# Altium PCB PCB1.PcbDoc
Units mm, origin at the board's own origin, x right, y up, seen from the top; angles counter-clockwise.
Board outline 65.28 x 64.52 mm, 2 copper layers (Top Layer, Bottom Layer); 33 components, 124 nets, 349 pads, 50 vias.
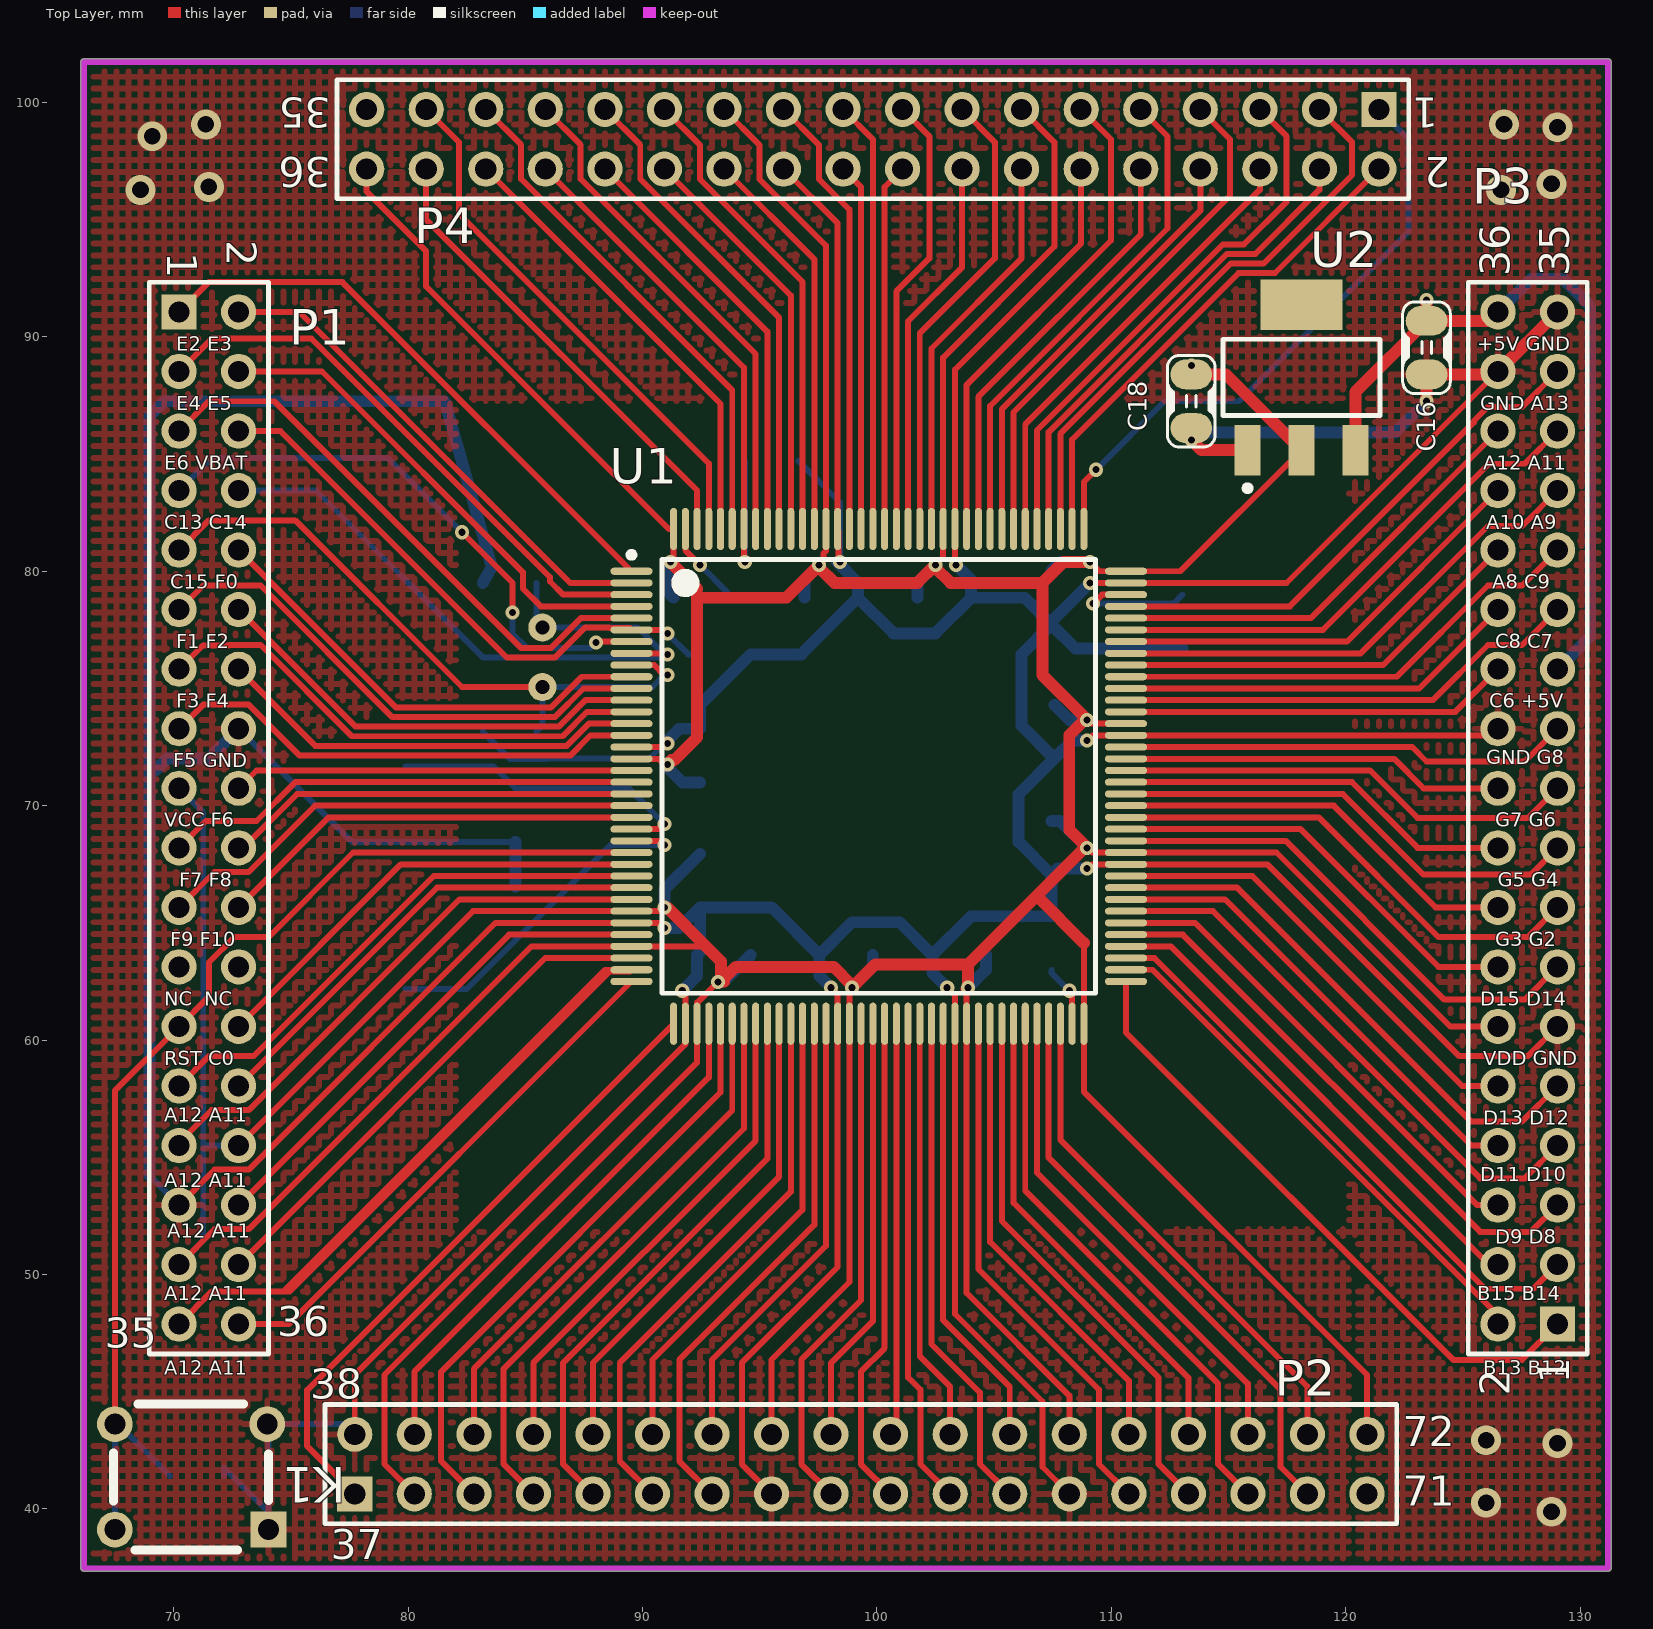
[diagram p0: Top Layer view]
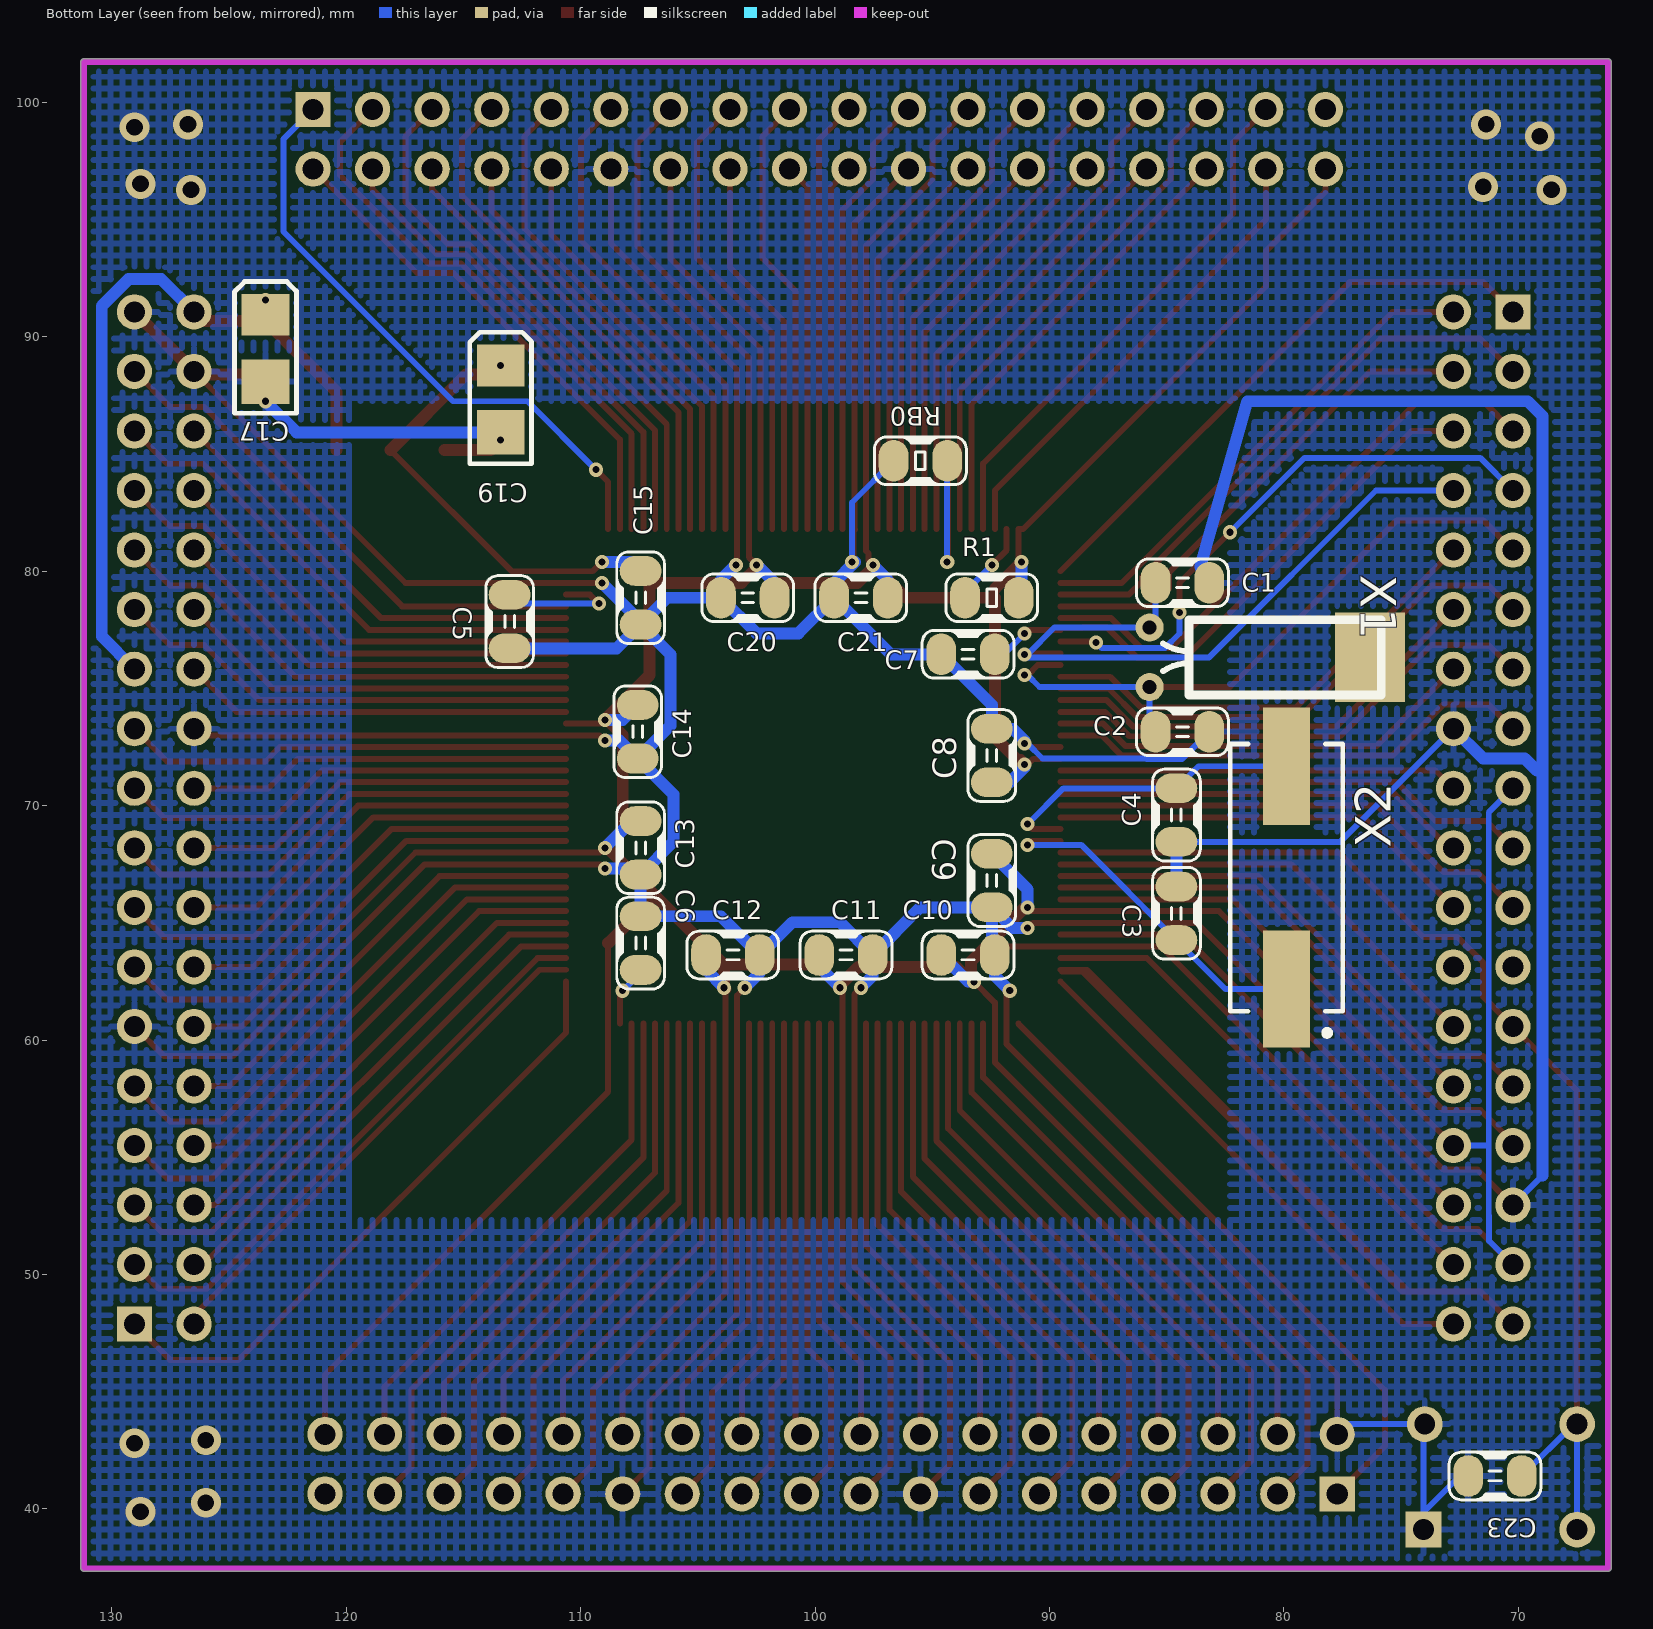
[diagram p1: Bottom Layer view, seen from below]
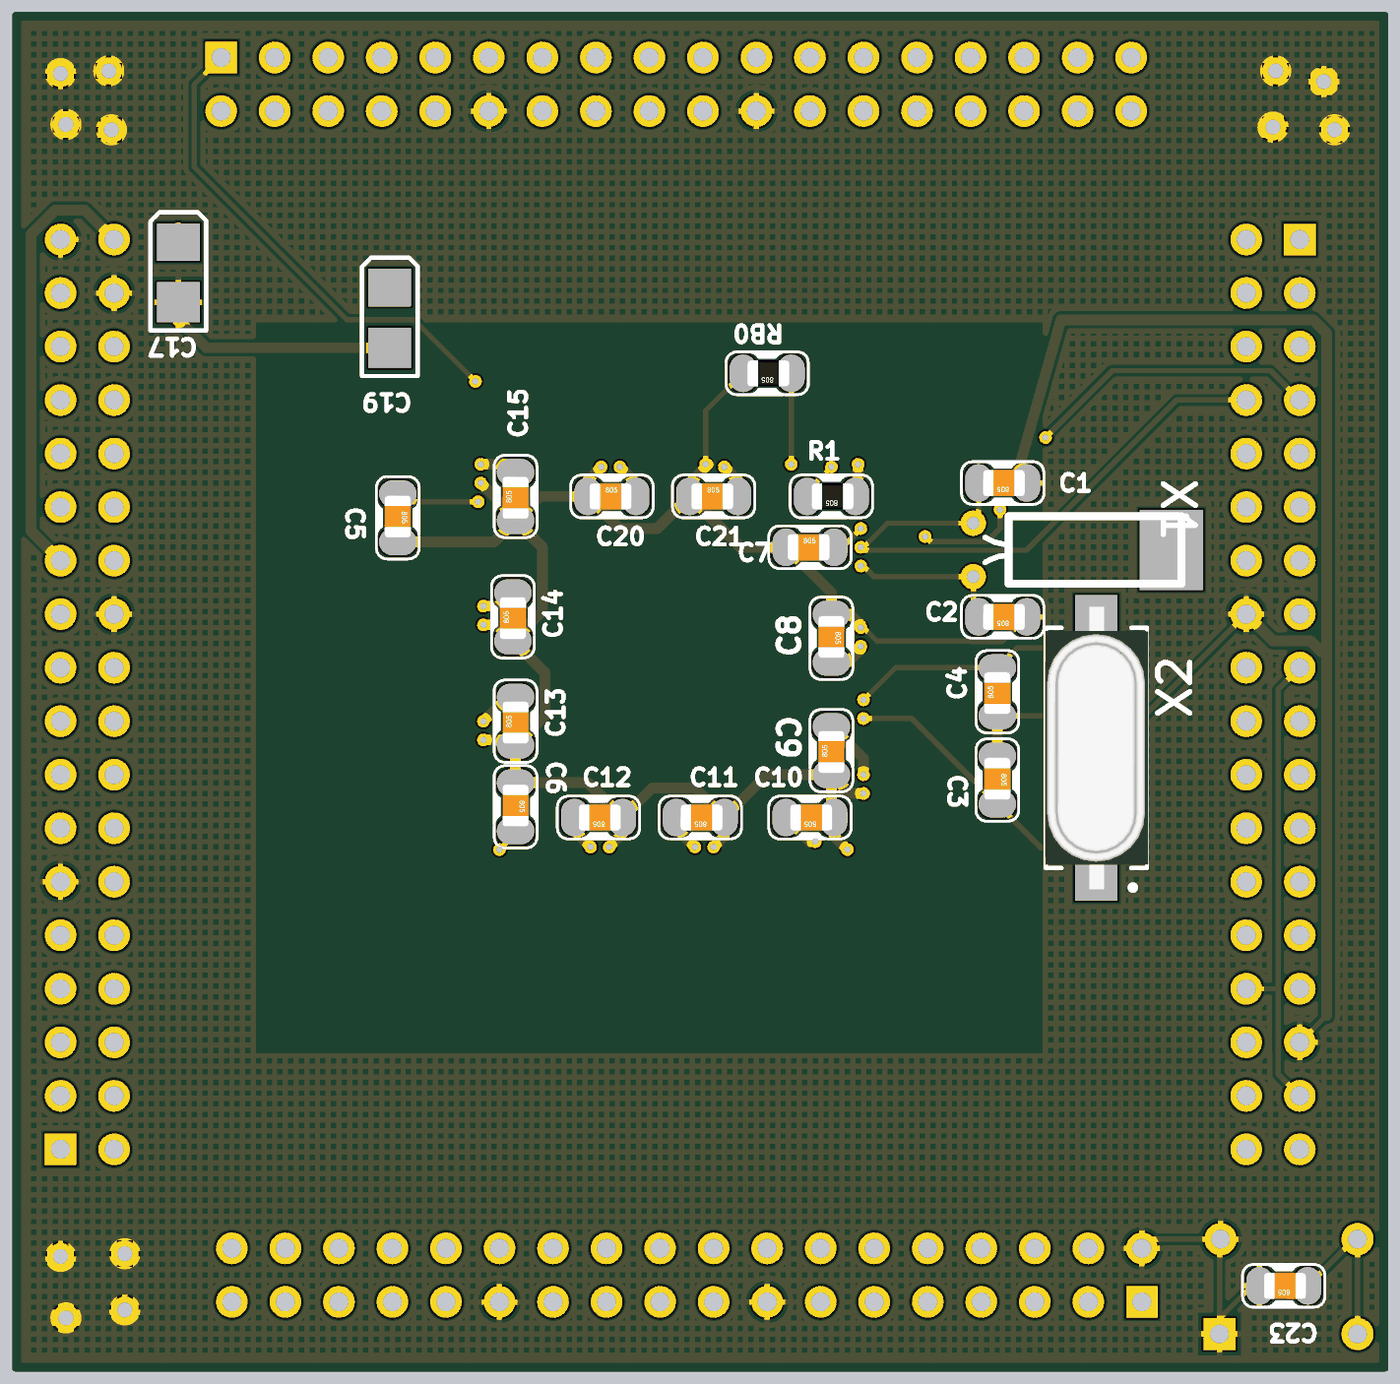
[diagram p2: 3D render of the assembled board from below, using the file's embedded part models]

## Layer stack, top to bottom
Top Solder: solder mask 0.0102, Solder Resist, Dk 3.5
Top Layer: signal copper 0.0356
Dielectric 1: dielectric 0.32, FR-4, Dk 4.8
Bottom Layer: signal copper 0.0356
Bottom Solder: solder mask 0.0102, Solder Resist, Dk 3.5

## Board outline
66.04,37.465 ccw(c66.167,37.465) 66.167,37.338 131.191,37.338 ccw(c131.191,37.465) 131.318,37.465 131.318,101.727 ccw(c131.191,101.727) 131.191,101.854 66.167,101.854 ccw(c66.167,101.727) 66.04,101.727

## Design rules (kind name [scope] priority, off if disabled: settings)
Clearance [All] p1: gap=0.152
PolygonConnect [All] p1: connectstyle=Relief reliefconductorwidth=0.254 reliefentries=4 polygonreliefangle="90 Angle" airgapwidth=0.254
RoutingVias [All] p1: holewidth=0.711 width=1.27 viastyle="Through Hole" minholewidth=0.711 minwidth=1.27 maxholewidth=0.711 maxwidth=1.27
SolderMaskExpansion [All] p1: expansion=0.102
Width VCC-GND [InNetClass('VCC-GND')] p1: maxlimit=0.762 minlimit=0.254 preferedwidth=0.254 minimp=50.000000 maximp=50.000000 favimp=50.000000
Width [All] p2: maxlimit=0.254 minlimit=0.254 preferedwidth=0.254
30 further rules are at their usual default settings.

## Classes and differential pairs
net class VCC-GND: +5V GND VCC
component class STM32F407ZGT6: C1 C2 C3 C4 C5 C6 C7 C8 C9 C10 C11 C12 C13 C14 C15 C16 C17 C18 C19 C20 C21 P1 P3 P4 R1 U1 U2 X1 X2

## Components (designator, comment, footprint, x,y, rotation, side; value= is the part's Value field where it differs from the comment)
C1 "Cap" 0805C 83.185,79.502 r0 bottom
C2 "Cap" 0805C 83.185,73.152 r0 bottom
C3 "Cap" 0805C 84.582,66.548 r270 bottom
C4 "Cap" 0805C 84.582,68.453 r90 bottom
C5 "Cap" 0805C 113.03,78.994 r270 bottom
C6 "Cap" 0805C 107.442,65.278 r270 bottom
C7 "Cap" 0805C 94.615,76.454 r180 bottom
C8 "Cap" 0805C 92.456,73.279 r270 bottom
C9 "Cap" 0805C 92.456,65.659 r90 bottom
C10 "Cap" 0805C 92.329,63.627 r0 bottom
C11 "Cap" 0805C 97.536,63.627 r0 bottom
C12 "Cap" 0805C 102.362,63.627 r0 bottom
C13 "Cap" 0805C 107.442,67.056 r90 bottom
C14 "Cap" 0805C 107.569,72.009 r90 bottom
C15 "Cap" 0805C 107.442,77.724 r90 bottom
C16 "Cap" 0805C 123.444,88.392 r90 top
C17 "Cap pol" CAP_SMD_3216 123.444,90.932 r270 bottom
C18 "Cap" 0805C 113.411,86.106 r90 top
C19 "Cap pol" CAP_SMD_3216 113.411,88.773 r270 bottom
C20 "Cap" 0805C 104.013,78.867 r180 bottom
C21 "Cap" 0805C 99.187,78.867 r180 bottom
C23 "Comment" 0805C 69.85,41.402 r0 bottom
K1 "Comment" Button 74.041,39.116 r180 top
P1 "Header 18X2" HDR2X18 70.231,91.059 r270 top
P2 "Header 18X2" HDR2X18 77.724,40.64 r0 top
P3 "Header 18X2" HDR2X18 129.032,47.879 r90 top
P4 "Header 18X2" HDR2X18 121.412,99.695 r180 top
R1 "Res" 0805R 91.313,78.867 r0 bottom
RB0 "Comment" 0805R 94.361,84.709 r0 bottom
U1 "STM32F407ZGT6" STM-LQFP144_N 100.076,71.247 r0 top
U2 "1117-xx" SOT-223_ 118.11,88.265 r0 top
X1 "XTAL_" XTAL_YUANZHU 85.725,77.597 r180 bottom
X2 "XTAL_" XTAL_SMD 79.883,66.929 r90 bottom

## Footprints (in the part's own frame and the unit in brackets; to place one, negate y for a bottom-side part, rotate by r counter-clockwise, add the part's x,y. Pads: shape width x height; smd on the part's side, far side on the other; paste and mask are expansions set on the pad)
0805C [mil] "0805封装电容"
  oval 50x70 smd: 1(0,0) 2(90,0)
  silkscreen extent -32,-40 122,40, body extent 3,-25 82,25, height 30
0805R [mil] "0805封装电阻"
  oval 50x70 smd: 1(0,0) 2(90,0)
  silkscreen extent -32,-40 122,40, body extent 3,-25 82,25, height 30
Button [mil] "按键"
  rect 60x60 hole 35: 1(0,0)
  round 60 hole 35: 2(2,-177.17) 3(257.91,-177.17) 4(257.91,0)
  silkscreen extent 0,-211 260,34, body extent -20,-210 278,34, height 276
CAP_SMD_3216 [mil] "贴片钽电容，10uF"
  rect 70x80 smd: 1(0,0)
  rect 75x80 smd: 2(112.2,0)
  silkscreen extent -56,-52 165,52, body extent -11,-35 123,35, height 63
HDR2X18 [mm] "Connector; Header; 18x2 Position"
  rect 1.5x1.5 hole 0.9: 1(0,0)
  round 1.5 hole 0.9: 2(0,2.54) 3(2.54,0) 4(2.54,2.54) 5(5.08,0) 6(5.08,2.54) 7(7.62,0) 8(7.62,2.54) 9(10.16,0) 10(10.16,2.54) 11(12.7,0) 12(12.7,2.54) 13(15.24,0) 14(15.24,2.54) 15(17.78,0) 16(17.78,2.54) 17(20.32,0) 18(20.32,2.54) 19(22.86,0) 20(22.86,2.54) 21(25.4,0) 22(25.4,2.54) 23(27.94,0) 24(27.94,2.54) 25(30.48,0) 26(30.48,2.54) 27(33.02,0) 28(33.02,2.54) 29(35.56,0) 30(35.56,2.54) 31(38.1,0) 32(38.1,2.54) 33(40.64,0) 34(40.64,2.54) 35(43.18,0) 36(43.18,2.54)
  silkscreen extent -1.27,-1.27 44.45,3.81
SOT-223_ [mm] "SOT-223/SC-73; 4 Leads; Body 6.7 x 7.3 mm, inc. leads (LxW max)"
  rect 1.1x2.15 smd: 1(-2.3,-3.1) 2(0,-3.1) 3(2.3,-3.1)
  rect 3.5x2.15 smd: 4(0,3.1)
  silkscreen extent -3.35,-4.85 3.35,1.62, body extent -3.25,-3.58 3.25,3.38, height 1.65
STM-LQFP144_N [mm] "Thin QFP, 144-Leads, Body 20x20mm, Pitch 0.5mm, IPC Medium Density"
  oval 1.8x0.3 smd: 1(-10.55,8.75) 2(-10.55,8.25) 3(-10.55,7.75) 4(-10.55,7.25) 5(-10.55,6.75) 6(-10.55,6.25) 7(-10.55,5.75) 8(-10.55,5.25) 9(-10.55,4.75) 10(-10.55,4.25) 11(-10.55,3.75) 12(-10.55,3.25) 13(-10.55,2.75) 14(-10.55,2.25) 15(-10.55,1.75) 16(-10.55,1.25) 17(-10.55,0.75) 18(-10.55,0.25) 19(-10.55,-0.25) 20(-10.55,-0.75) 21(-10.55,-1.25) 22(-10.55,-1.75) 23(-10.55,-2.25) 24(-10.55,-2.75) 25(-10.55,-3.25) 26(-10.55,-3.75) 27(-10.55,-4.25) 28(-10.55,-4.75) 29(-10.55,-5.25) 30(-10.55,-5.75) 31(-10.55,-6.25) 32(-10.55,-6.75) 33(-10.55,-7.25) 34(-10.55,-7.75) 35(-10.55,-8.25) 36(-10.55,-8.75) 73(10.55,-8.75) 74(10.55,-8.25) 75(10.55,-7.75) 76(10.55,-7.25) 77(10.55,-6.75) 78(10.55,-6.25) 79(10.55,-5.75) 80(10.55,-5.25) 81(10.55,-4.75) 82(10.55,-4.25) 83(10.55,-3.75) 84(10.55,-3.25) 85(10.55,-2.75) 86(10.55,-2.25) 87(10.55,-1.75) 88(10.55,-1.25) 89(10.55,-0.75) 90(10.55,-0.25) 91(10.55,0.25) 92(10.55,0.75) 93(10.55,1.25) 94(10.55,1.75) 95(10.55,2.25) 96(10.55,2.75) 97(10.55,3.25) 98(10.55,3.75) 99(10.55,4.25) 100(10.55,4.75) 101(10.55,5.25) 102(10.55,5.75) 103(10.55,6.25) 104(10.55,6.75) 105(10.55,7.25) 106(10.55,7.75) 107(10.55,8.25) 108(10.55,8.75)
  oval 0.3x1.8 smd: 37(-8.75,-10.55) 38(-8.25,-10.55) 39(-7.75,-10.55) 40(-7.25,-10.55) 41(-6.75,-10.55) 42(-6.25,-10.55) 43(-5.75,-10.55) 44(-5.25,-10.55) 45(-4.75,-10.55) 46(-4.25,-10.55) 47(-3.75,-10.55) 48(-3.25,-10.55) 49(-2.75,-10.55) 50(-2.25,-10.55) 51(-1.75,-10.55) 52(-1.25,-10.55) 53(-0.75,-10.55) 54(-0.25,-10.55) 55(0.25,-10.55) 56(0.75,-10.55) 57(1.25,-10.55) 58(1.75,-10.55) 59(2.25,-10.55) 60(2.75,-10.55) 61(3.25,-10.55) 62(3.75,-10.55) 63(4.25,-10.55) 64(4.75,-10.55) 65(5.25,-10.55) 66(5.75,-10.55) 67(6.25,-10.55) 68(6.75,-10.55) 69(7.25,-10.55) 70(7.75,-10.55) 71(8.25,-10.55) 72(8.75,-10.55) 109(8.75,10.55) 110(8.25,10.55) 111(7.75,10.55) 112(7.25,10.55) 113(6.75,10.55) 114(6.25,10.55) 115(5.75,10.55) 116(5.25,10.55) 117(4.75,10.55) 118(4.25,10.55) 119(3.75,10.55) 120(3.25,10.55) 121(2.75,10.55) 122(2.25,10.55) 123(1.75,10.55) 124(1.25,10.55) 125(0.75,10.55) 126(0.25,10.55) 127(-0.25,10.55) 128(-0.75,10.55) 129(-1.25,10.55) 130(-1.75,10.55) 131(-2.25,10.55) 132(-2.75,10.55) 133(-3.25,10.55) 134(-3.75,10.55) 135(-4.25,10.55) 136(-4.75,10.55) 137(-5.25,10.55) 138(-5.75,10.55) 139(-6.25,10.55) 140(-6.75,10.55) 141(-7.25,10.55) 142(-7.75,10.55) 143(-8.25,10.55) 144(-8.75,10.55)
  silkscreen extent -10.67,-9.25 9.25,9.57, body extent -10,-10 10,10, height 1.6
XTAL_SMD [mm] "假贴片晶振"
  rect 5x2 smd: 1(-4.75,0) 2(4.75,0)
  silkscreen extent -6.75,-2.4 5.7,2.4, body extent -6.7,-2.46 6.7,2.44, height 4
XTAL_YUANZHU [mm] "圆柱晶振"
  round 1.2 hole 0.6: 1(0,0) 2(0,-2.54)
  rect 3x3.8 smd: 3(9.398,-1.27)
  silkscreen extent 0.57,-2.87 9.88,0.33

## Part data
C1 C2 C3 C4 C5 C6 C7 C8 C9 C10 C11 C12 C13 C14 C15 C16 C18 C20 C21: "无极性电容"
C17 C19: "极性电容"
P1 P2 P3 P4: "Header, 18-Pin, Dual row"
R1: library part Res_, "电阻"
U1: "ARM Cortex-M4 32-bit MCU+FPU, 210 DMIPS, 1024 kB Flash, 192 kB Internal RAM, 114 I/Os, 144-pin LQFP, -40 to 85 degC, Tray"
U2: "稳压芯片"
X1 X2: library part XTAL_M, "晶振"

## Via types
v1: diameter 0.6, hole 0.3, Top Layer to Bottom Layer, 38 vias
v2: diameter 1.27, hole 0.711, Top Layer to Bottom Layer, 12 vias

## Nets (pads, with @x,y where several pads share a name; then routed paths per layer and width w, separated by ;. In a path a pad name is that pad's centre, name@x,y a point inside that pad or via, vN(x,y) a via of type N, cw(c..) or ccw(c..) an arc to the next point about the centre after c; other vN are vias at no path point)
+5V: C16.2 C17.1 P3.23 P3.36 U2.3 | length 32.1
  Top Layer w0.508: U2.3 120.41,87.644 C16.2 ; v1(123.444,91.567) C16.2 ; P3.36 126.111,90.678 C16.2
  Bottom Layer w0.254: P3.36 P3.36@126.619,91.059
  Bottom Layer w0.508: P3.36 127.889,92.456 129.286,92.456 130.429,91.313 130.429,77.216 P3.23
BOOT0: P4.30 RB0.1 U1.138 | length 24.6
  Top Layer w0.254: P4.30 94.326,88.681 U1.138 94.326,80.426 v1(94.361,80.391)
  Bottom Layer w0.254: v1(94.361,80.391) RB0.1
GND: C1.1 C2.1 C3.1 C4.1 C5.2 C6.1 C7.1 C8.1 C9.1 C10.1 C11.1 C12.1 C13.1 C14.1 C15.1 C16.1 C17.2 C18.1 C19.2 C20.1 C21.1 C23.2 K1.1 K1.2 P1.16 P1.31 P2.2 P2.15 P2.25 P3.11 P3.22 P3.34 P3.35 P4.12 P4.22 RB0.2 U1.16 U1.31 U1.38 U1.51 U1.61 U1.83 U1.94 U1.107 U1.120 U1.130 U2.1 | length 399.3
  Top Layer w0.254: P1.31 71.742,54.47 73.197,54.47 83.725,64.997 U1.31 90.705,64.997 v1(90.932,64.77) ; P2.2 77.724,45.72 91.826,59.822 U1.38 91.826,61.971 v1(91.694,62.103) ; U1.16 90.912,72.497 v1(91.059,72.644) ; P2.15 94.234,41.91 94.234,46.228 98.326,50.32 U1.51 98.326,61.948 v1(98.044,62.23) ; P4.22 98.326,94.841 U1.130 98.298,81.769 98.361,81.706 98.361,80.391 v1@98.298,80.391 ; v1(102.997,62.23) 103.326,61.901 U1.61 103.326,48.312 107.061,44.577 107.061,41.783 P2.25 ; v1(103.378,80.264) 103.326,80.316 U1.120 103.326,88.594 108.712,93.98 P4.12 ; v1(108.966,67.31) 109.153,67.497 U1.83 116.653,67.497 124.841,59.309 127.762,59.309 P3.11 ; v1(108.966,72.771) 109.192,72.997 U1.94 126.21,72.997 P3.22 ; v1(109.093,79.502) 109.098,79.497 U1.107 117.47,79.497 P3.34@126.365,88.392
  Top Layer w0.508: C18.1 v1(113.411,85.598) 113.844,85.165 U2.1 ; v1(123.444,87.249) C16.1 126.365,88.392 P3.34 P3.35
  Bottom Layer w0.254: 68.961,54.229 P1.31 ; 68.961,71.247 69.202,71.488 ; C23.2 72.136,41.762 74.041,39.857 74.041,43.565 K1.2 77.288,43.616 P2.2 ; P1.16 77.597,68.453 C4.1 ; C2.1 84.353,71.984 85.85,71.984 85.875,72.009 90.297,72.009 90.932,72.644 v1(91.059,72.644) ; RB0.2 98.425,82.931 v1(98.425,80.391)
  Bottom Layer w0.508: 68.961,54.229 68.961,71.247 68.961,86.614 69.596,87.249 81.562,87.249 83.564,80.181 C1.1 ; 69.202,71.488 69.723,72.009 71.501,72.009 P1.16 ; C3.1 C4.1 ; v1(90.932,64.77) 91.567,64.77 C9.1 ; v1(91.059,72.644) 91.059,72.771 91.567,73.279 C8.1 92.456,74.295 C7.1 96.774,76.454 C21.1 ; v1(91.694,62.103) 92.329,62.738 C10.1 92.456,63.754 C9.1 ; v1(98.044,62.23) 97.536,62.738 C11.1 ; v1@98.298,80.391 99.187,79.502 C21.1 ; v1(102.997,62.23) 102.362,62.865 C12.1 ; v1(103.378,80.264) 104.013,79.629 C20.1 ; v1(108.966,67.31) 107.696,67.31 C13.1 ; v1(108.966,72.771) 108.331,72.771 C14.1 ; v1(109.093,79.502) 107.442,77.851 C15.1 ; C5.2 108.458,76.708 C15.1 ; C19.2 122.118,85.923 v1(123.444,87.249) ; C9.1 95.504,65.659 C11.1 ; C11.1 98.933,65.024 100.965,65.024 C12.1 ; C21.1 100.711,77.343 102.489,77.343 C20.1 ; C12.1 104.013,65.278 C6.1 C13.1 ; C20.1 106.299,78.867 C15.1 ; C13.1 106.045,68.453 106.045,70.485 C14.1 ; C15.1 106.172,76.454 106.172,73.406 C14.1
  other v2: 128.778,39.878 125.984,40.259 129.032,42.799 125.984,42.926 68.58,96.266 126.619,96.266 71.501,96.393 128.778,96.52 69.088,98.552 129.032,98.933 71.374,99.06 126.746,99.06
NetC3_2: C3.2 U1.24 X2.1 | length 15.1
  Top Layer w0.254: U1.24 90.761,68.497 v1(90.932,68.326)
  Bottom Layer w0.254: X2.1 82.499,62.179 C3.2 88.646,68.326 v1(90.932,68.326)
NetC4_2: C4.2 U1.23 X2.2 | length 13.6
  Top Layer w0.254: U1.23 90.714,68.997 v1(90.932,69.215)
  Bottom Layer w0.254: X2.2 83.642,71.679 C4.2 89.408,70.739 v1(90.932,69.215)
NetC5_1: C5.1 U1.106 | length 5.5
  Top Layer w0.254: v1(109.22,78.613) 109.604,78.997 U1.106
  Bottom Layer w0.254: v1(109.22,78.613) 112.649,78.613 C5.1
NetC6_2: C6.2 U1.71 | length 2.7
  Top Layer w0.254: v1(108.204,62.103) 108.326,61.981 U1.71
  Bottom Layer w0.254: C6.2 107.442,62.865 v1(108.204,62.103)
NetR1_2: R1.2 U1.143 | length 3.7
  Top Layer w0.254: U1.143 91.826,80.894 v1(92.456,80.264)
  Bottom Layer w0.254: v1(92.456,80.264) 93.599,79.121 R1.2
PA0: P1.34 U1.34 | length 22.2
  Top Layer w0.254: P1.34 85.849,63.497 U1.34
PA1: P1.35 U1.35 | length 46.1
  Top Layer w0.254: P1.35 71.628,49.276 74.686,49.276 ; 74.686,49.276 88.407,62.997 U1.35 89.455,62.926 88.598,62.926 74.948,49.276 74.686,49.276
PA2: P1.36 U1.36 | length 22.8
  Top Layer w0.254: P1.36 74.908,47.879 U1.36
PA3: P2.1 U1.37 | length 27.4
  Top Layer w0.254: P2.1 75.692,42.672 75.692,45.063 U1.37
PA4: P2.4 U1.40 | length 22.7
  Top Layer w0.254: P2.4 80.264,45.847 92.826,58.409 U1.40
PA5: P2.5 U1.41 | length 25.6
  Top Layer w0.254: P2.5 81.407,42.037 81.407,45.847 93.326,57.766 U1.41
PA6: P2.6 U1.42 | length 22.1
  Top Layer w0.254: P2.6 82.804,45.974 93.826,56.996 U1.42
PA7: P2.7 U1.43 | length 24.8
  Top Layer w0.254: P2.7 84.074,41.91 84.074,45.974 94.326,56.226 U1.43
PA8: P3.28 U1.100 | length 17.9
  Top Layer w0.254: U1.100 121.59,75.997 P3.28
PA9: P3.29 U1.101 | length 21.3
  Top Layer w0.254: U1.101 120.634,76.497 126.066,81.928 127.521,81.928 P3.29
PA10: P3.30 U1.102 | length 18.5
  Top Layer w0.254: U1.102 120.05,76.997 P3.30
PA11: P3.31 U1.103 | length 21.9
  Top Layer w0.254: U1.103 119.026,77.497 126.111,84.582 127.635,84.582 P3.31
PA12: P3.32 U1.104 | length 19.2
  Top Layer w0.254: U1.104 118.51,77.997 P3.32
PA13: P3.33 U1.105 | length 22.6
  Top Layer w0.254: U1.105 117.613,78.497 125.463,86.347 125.463,86.405 126.066,87.008 127.521,87.008 P3.33
PA14: P4.1 U1.109 | length 26
  Top Layer w0.254: U1.109 108.826,83.807 v1(109.347,84.328)
  Bottom Layer w0.254: v1(109.347,84.328) 112.268,87.249 115.443,87.249 122.682,94.488 122.682,98.425 P4.1
PA15: P4.2 U1.110 | length 21.7
  Top Layer w0.254: U1.110 108.326,85.616 115.429,92.719 116.976,92.719 P4.2
PB0: P2.10 U1.46 | length 20.8
  Top Layer w0.254: P2.10 87.884,46.228 95.826,54.17 U1.46
PB1: P2.11 U1.47 | length 23.7
  Top Layer w0.254: P2.11 89.027,42.037 89.027,46.228 96.326,53.527 U1.47
PB2: P2.12 U1.48 | length 20.2
  Top Layer w0.254: P2.12 90.424,46.355 96.826,52.757 U1.48
PB3: P4.25 U1.133 | length 20.3
  Top Layer w0.254: P4.25 92.443,98.184 92.443,96.729 96.826,92.345 U1.133
PB4: P4.26 U1.134 | length 17.6
  Top Layer w0.254: P4.26 96.326,91.761 U1.134
PB5: P4.27 U1.135 | length 21
  Top Layer w0.254: P4.27 89.903,98.184 89.903,96.729 95.826,90.805 U1.135
PB6: P4.28 U1.136 | length 18.2
  Top Layer w0.254: P4.28 95.326,90.221 U1.136
PB7: P4.29 U1.137 | length 21.6
  Top Layer w0.254: P4.29 87.363,98.184 87.363,96.729 94.826,89.265 U1.137
PB8: P4.31 U1.139 | length 22.3
  Top Layer w0.254: P4.31 84.823,98.184 84.823,96.729 93.826,87.725 U1.139
PB9: P4.32 U1.140 | length 19.5
  Top Layer w0.254: P4.32 93.326,87.141 U1.140
PB10: P2.33 U1.69 | length 24.6
  Top Layer w0.254: U1.69 107.326,54.98 117.221,45.085 117.221,41.783 P2.33
PB11: P2.34 U1.70 | length 21.9
  Top Layer w0.254: U1.70 107.826,55.75 118.364,45.212 P2.34
PB12: P3.1 U1.73 | length 27
  Top Layer w0.254: U1.73 110.626,60.316 124.587,46.355 127.508,46.355 P3.1
PB13: P3.2 U1.74 | length 22.4
  Top Layer w0.254: U1.74 111.755,62.997 126.492,48.26 P3.2
PB14: P3.3 U1.75 | length 24.7
  Top Layer w0.254: U1.75 111.83,63.497 125.937,49.39 128.003,49.39 P3.3
PB15: P3.4 U1.76 | length 21.5
  Top Layer w0.254: U1.76 112.533,63.997 126.111,50.419 P3.4
PC0: P1.26 U1.26 | length 19.6
  Top Layer w0.254: P1.26 79.689,67.497 U1.26
PC1: P1.27 U1.27 | length 23
  Top Layer w0.254: P1.27 71.501,59.309 73.406,59.309 81.094,66.997 U1.27
PC2: P1.28 U1.28 | length 20.3
  Top Layer w0.254: P1.28 81.229,66.497 U1.28
PC3: P1.29 U1.29 | length 23.7
  Top Layer w0.254: P1.29 70.231,55.626 71.615,57.01 73.197,57.01 82.185,65.997 U1.29
PC4: P2.8 U1.44 | length 21.4
  Top Layer w0.254: P2.8 85.344,46.228 94.826,55.71 U1.44
PC5: P2.9 U1.45 | length 24.2
  Top Layer w0.254: P2.9 86.614,41.91 86.614,46.228 95.326,54.94 U1.45
PC6: P3.24 U1.96 | length 16.6
  Top Layer w0.254: U1.96 124.67,73.997 P3.24
PC7: P3.25 U1.97 | length 20
  Top Layer w0.254: U1.97 123.714,74.497 126.066,76.848 127.521,76.848 P3.25
PC8: P3.26 U1.98 | length 17.3
  Top Layer w0.254: U1.98 123.13,74.997 P3.26
PC9: P3.27 U1.99 | length 20.6
  Top Layer w0.254: U1.99 122.174,75.497 126.066,79.388 127.521,79.388 P3.27
PC10: P4.3 U1.111 | length 24.4
  Top Layer w0.254: U1.111 107.826,85.855 115.097,93.126 116.494,93.126 120.269,96.901 120.269,98.298 P4.3
PC11: P4.4 U1.112 | length 20.8
  Top Layer w0.254: U1.112 107.326,85.93 114.928,93.532 116.138,93.532 118.872,96.266 P4.4
PC12: P4.5 U1.113 | length 23.3
  Top Layer w0.254: U1.113 106.826,86.004 114.76,93.939 115.656,93.939 117.475,95.758 117.475,98.552 P4.5
PC13: P1.7 U1.7 | length 24.6
  Top Layer w0.254: v1(82.296,81.661) 84.455,79.502 v1(84.455,78.232) ; v1(88.011,76.962) 88.046,76.997 U1.7
  Bottom Layer w0.254: P1.7 71.628,84.836 79.121,84.836 v1(82.296,81.661) ; v1(84.455,78.232) 84.455,77.343 85.08,76.718 87.767,76.718 v1(88.011,76.962)
PC14: C1.2 P1.8 U1.8 X1.1 | length 31.3
  Top Layer w0.254: U1.8 90.889,76.497 91.059,76.327 v1(91.059,76.454)
  Bottom Layer w0.254: P1.8 76.073,83.439 83.201,76.311 91.043,76.311 v1@91.059,76.327 ; C1.2 85.471,77.851 X1.1 89.789,77.597 90.932,76.454 v1(91.059,76.454) ; v1@90.889,76.497 v1@91.059,76.327 ; v1@91.059,76.327 v1(91.059,76.454) ; v1@91.059,76.327 v1(91.059,76.454)
PC15: C2.2 P1.9 U1.9 X1.2 | length 28.2
  Top Layer w0.254: P1.9 71.501,82.169 75.184,82.169 82.296,75.057 X1.2 ; U1.9 90.5,75.997 90.932,75.565 v1(91.059,75.565)
  Bottom Layer w0.254: C2.2 85.725,73.406 X1.2 90.424,75.057 90.932,75.565 v1(91.059,75.565)
PD0: P4.6 U1.114 | length 19.5
  Top Layer w0.254: U1.114 106.326,86.26 116.332,96.266 P4.6
PD1: P4.7 U1.115 | length 22.2
  Top Layer w0.254: U1.115 105.826,86.776 115.062,96.012 115.062,98.425 P4.7
PD2: P4.8 U1.116 | length 18.9
  Top Layer w0.254: U1.116 105.326,86.911 113.792,95.377 P4.8
PD3: P4.9 U1.117 | length 21.5
  Top Layer w0.254: U1.117 104.826,87.046 112.395,94.615 112.395,98.552 P4.9
PD4: P4.10 U1.118 | length 18.2
  Top Layer w0.254: U1.118 104.326,87.435 111.252,94.361 P4.10
PD5: P4.11 U1.119 | length 21
  Top Layer w0.254: U1.119 103.826,87.951 109.982,94.107 109.982,98.425 P4.11
PD6: P4.14 U1.122 | length 17
  Top Layer w0.254: U1.122 102.326,89.499 106.172,93.345 P4.14
PD7: P4.15 U1.123 | length 19.8
  Top Layer w0.254: U1.123 101.826,90.142 105.029,93.345 105.029,98.298 P4.15
PD8: P3.5 U1.77 | length 24.1
  Top Layer w0.254: U1.77 113.049,64.497 125.73,51.816 127.889,51.816 P3.5
PD9: P3.6 U1.78 | length 20.9
  Top Layer w0.254: U1.78 113.565,64.997 125.603,52.959 P3.6
PD10: P3.7 U1.79 | length 23.7
  Top Layer w0.254: U1.79 114.335,65.497 125.73,54.102 127.635,54.102 P3.7
PD11: P3.8 U1.80 | length 20.2
  Top Layer w0.254: U1.80 114.851,65.997 125.349,55.499 P3.8
PD12: P3.9 U1.81 | length 23.2
  Top Layer w0.254: U1.81 115.367,66.497 125.336,56.528 126.918,56.528 126.932,56.515 127.508,56.515 P3.9
PD13: P3.10 U1.82 | length 19.6
  Top Layer w0.254: U1.82 116.01,66.997 124.968,58.039 P3.10
PD14: P3.13 U1.85 | length 21.8
  Top Layer w0.254: U1.85 117.431,68.497 124.206,61.722 127.635,61.722 P3.13
PD15: P3.14 U1.86 | length 18.3
  Top Layer w0.254: U1.86 118.074,68.997 123.952,63.119 P3.14
PE0: P4.33 U1.141 | length 22.9
  Top Layer w0.254: P4.33 82.169,98.298 82.169,95.248 92.826,84.591 U1.141
PE1: P4.34 U1.142 | length 20.1
  Top Layer w0.254: P4.34 80.772,94.996 92.326,83.442 U1.142
PE2: P1.1 U1.1 | length 24.9
  Top Layer w0.254: P1.1 71.501,92.329 77.194,92.329 U1.1
PE3: P1.2 U1.2 | length 21.5
  Top Layer w0.254: P1.2 75.358,91.059 86.92,79.497 U1.2
PE4: P1.3 U1.3 | length 24.5
  Top Layer w0.254: P1.3 71.628,89.916 75.876,89.916 86.05,79.742 86.05,79.558 86.611,78.997 U1.3
PE5: P1.4 U1.4 | length 21.3
  Top Layer w0.254: P1.4 76.327,88.519 84.892,79.954 84.892,79.262 85.657,78.497 U1.4
PE6: P1.5 U1.5 | length 24.7
  Top Layer w0.254: P1.5 71.501,87.249 74.295,87.249 84.826,76.718 86.089,76.718 87.369,77.997 U1.5
PE7: P2.22 U1.58 | length 18.1
  Top Layer w0.254: U1.58 101.826,46.51 103.124,45.212 P2.22
PE8: P2.23 U1.59 | length 21.4
  Top Layer w0.254: U1.59 102.326,47.026 104.394,44.958 104.394,41.91 P2.23
PE9: P2.24 U1.60 | length 18.7
  Top Layer w0.254: U1.60 102.826,48.05 105.664,45.212 P2.24
PE10: P2.27 U1.63 | length 22.7
  Top Layer w0.254: U1.63 104.326,50.233 109.474,45.085 109.474,41.91 P2.27
PE11: P2.28 U1.64 | length 20
  Top Layer w0.254: U1.64 104.826,51.384 110.744,45.466 P2.28
PE12: P2.29 U1.65 | length 23.4
  Top Layer w0.254: U1.65 105.326,52.281 112.014,45.593 112.014,41.91 P2.29
PE13: P2.30 U1.66 | length 20.6
  Top Layer w0.254: U1.66 105.826,53.051 113.284,45.593 P2.30
PE14: P2.31 U1.67 | length 24
  Top Layer w0.254: U1.67 106.326,53.567 114.554,45.339 114.554,41.91 P2.31
PE15: P2.32 U1.68 | length 21.2
  Top Layer w0.254: U1.68 106.826,54.337 115.824,45.339 P2.32
PF0: P1.10 U1.10 | length 20.1
  Top Layer w0.254: P1.10 79.492,74.178 86.089,74.178 87.409,75.497 U1.10
PF1: P1.11 U1.11 | length 22.6
  Top Layer w0.254: P1.11 71.26,79.388 73.707,79.388 79.324,73.771 86.258,73.771 87.483,74.997 U1.11
PF2: P1.12 U1.12 | length 19.3
  Top Layer w0.254: P1.12 77.765,73.365 86.426,73.365 87.558,74.497 U1.12
PF3: P1.13 U1.13 | length 21.8
  Top Layer w0.254: P1.13 71.247,76.835 72.331,76.835 72.345,76.848 73.707,76.848 77.597,72.958 86.594,72.958 87.633,73.997 U1.13
PF4: P1.14 U1.14 | length 18.5
  Top Layer w0.254: P1.14 76.038,72.552 86.763,72.552 87.708,73.497 U1.14
PF5: P1.15 U1.15 | length 21
  Top Layer w0.254: P1.15 71.26,74.308 73.197,74.308 75.36,72.146 86.931,72.146 87.782,72.997 U1.15
PF6: P1.18 U1.18 | length 17.1
  Top Layer w0.254: P1.18 73.529,71.497 U1.18
PF7: P1.19 U1.19 | length 20.5
  Top Layer w0.254: P1.19 71.374,69.342 73.533,69.342 75.188,70.997 U1.19
PF8: P1.20 U1.20 | length 17.7
  Top Layer w0.254: P1.20 72.965,68.199 75.263,70.497 U1.20
PF9: P1.21 U1.21 | length 21.1
  Top Layer w0.254: P1.21 71.742,67.17 73.197,67.17 76.025,69.997 U1.21
PF10: P1.22 U1.22 | length 18.3
  Top Layer w0.254: P1.22 76.609,69.497 U1.22
PF11: P2.13 U1.49 | length 23
  Top Layer w0.254: P2.13 91.567,42.037 91.567,46.355 97.326,52.114 U1.49
PF12: P2.14 U1.50 | length 19.5
  Top Layer w0.254: P2.14 92.964,46.355 97.826,51.217 U1.50
PF13: P2.17 U1.53 | length 21.6
  Top Layer w0.254: P2.17 96.774,41.91 96.774,46.355 99.326,48.907 U1.53
PF14: P2.18 U1.54 | length 18.3
  Top Layer w0.254: P2.18 98.044,46.228 99.826,48.01 U1.54
PF15: P2.19 U1.55 | length 21
  Top Layer w0.254: U1.55 100.326,46.859 99.314,45.847 99.314,41.91 P2.19
PG0: P2.20 U1.56 | length 17.6
  Top Layer w0.254: P2.20 100.826,43.422 U1.56
PG1: P2.21 U1.57 | length 20.8
  Top Layer w0.254: U1.57 101.326,45.613 101.854,45.085 101.854,41.91 P2.21
PG2: P3.15 U1.87 | length 21
  Top Layer w0.254: U1.87 118.844,69.497 123.952,64.389 127.762,64.389 P3.15
PG3: P3.16 U1.88 | length 17.7
  Top Layer w0.254: U1.88 119.487,69.997 123.825,65.659 P3.16
PG4: P3.17 U1.89 | length 20.3
  Top Layer w0.254: U1.89 119.876,70.497 123.317,67.056 127.889,67.056 P3.17
PG5: P3.18 U1.90 | length 17
  Top Layer w0.254: U1.90 120.265,70.997 123.063,68.199 P3.18
PG6: P3.19 U1.91 | length 19.8
  Top Layer w0.254: U1.91 121.035,71.497 123.063,69.469 127.762,69.469 P3.19
PG7: P3.20 U1.92 | length 16.4
  Top Layer w0.254: U1.92 122.059,71.997 123.317,70.739 P3.20
PG8: P3.21 U1.93 | length 19.2
  Top Layer w0.254: U1.93 122.829,72.497 123.444,71.882 127.635,71.882 P3.21
PG9: P4.16 U1.124 | length 16.3
  Top Layer w0.254: U1.124 101.326,90.658 103.632,92.964 P4.16
PG10: P4.17 U1.125 | length 19
  Top Layer w0.254: U1.125 100.826,91.936 102.235,93.345 102.235,98.552 P4.17
PG11: P4.18 U1.126 | length 15.7
  Top Layer w0.254: U1.126 100.326,96.389 P4.18
PG12: P4.19 U1.127 | length 18.4
  Top Layer w0.254: P4.19 99.826,98.421 U1.127
PG13: P4.20 U1.128 | length 15.7
  Top Layer w0.254: P4.20 99.326,96.381 U1.128
PG14: P4.21 U1.129 | length 19.1
  Top Layer w0.254: P4.21 97.523,98.184 97.523,96.729 98.826,95.425 U1.129
PG15: P4.24 U1.132 | length 17
  Top Layer w0.254: P4.24 97.326,93.301 U1.132
RST: C23.1 K1.3 K1.4 P1.25 U1.25 | length 48.9
  Top Layer w0.254: K1.3 67.49,57.838 P1.25 71.501,61.849 71.501,63.305 72.585,64.389 74.041,64.389 77.649,67.997 U1.25
  Bottom Layer w0.254: K1.4 K1.3 ; K1.3@67.636,43.616 C23.1
VBAT: C7.2 P1.6 U1.6 | length 24.6
  Top Layer w0.254: P1.6 74.549,85.979 84.217,76.311 86.258,76.311 87.537,77.591 88.575,77.591 88.598,77.568 89.455,77.568 U1.6 90.905,77.497 v1(91.059,77.343)
  Bottom Layer w0.254: v1(91.059,77.343) 91.948,76.454 C7.2
VCC: C8.2 C9.2 C10.2 C11.2 C12.2 C13.2 C14.2 C15.2 C18.2 C19.1 C20.2 C21.2 P1.17 P1.30 P1.33 P2.3 P2.16 P2.26 P2.36 P3.12 P4.13 P4.23 P4.36 R1.1 U1.17 U1.30 U1.33 U1.39 U1.52 U1.62 U1.72 U1.84 U1.95 U1.108 U1.121 U1.131 U1.144 U2.2 | length 364.6
  Top Layer w0.254: P1.33 71.742,51.93 73.197,51.93 85.265,63.997 U1.33 92.704,63.997 ; P1.30 82.769,65.497 U1.30 90.77,65.497 v1(90.932,65.659) ; P4.36 78.232,96.19 80.772,93.65 80.772,92.145 91.12,81.797 U1.144 91.326,80.531 v1(91.186,80.391) ; P2.3 78.994,41.91 78.994,45.72 92.326,59.052 U1.39 92.326,61.592 v1(93.218,62.484) ; U1.17 90.69,71.997 90.932,71.755 v1(91.059,71.755) v1@91.042,71.755 ; P4.23 94.983,98.184 94.983,96.729 97.826,93.885 U1.131 97.826,80.865 97.719,80.758 97.719,80.447 v1(97.536,80.264) ; P2.16 95.504,46.355 98.826,49.677 U1.52 98.826,62.123 v1(98.933,62.23) ; v1(102.489,80.264) 102.826,80.601 U1.121 102.826,89.11 107.569,93.853 107.569,98.298 P4.13 ; v1@103.826,62.17 U1.62 103.826,49.209 108.204,44.831 P2.26 ; 108.826,64.131 U1.72 108.826,57.798 120.904,45.72 P2.36 ; v1(108.966,68.199) 109.168,67.997 U1.84 117.042,67.997 124.46,60.579 P3.12 ; v1(108.966,73.66) 109.129,73.497 U1.95 ; v1(109.093,80.391) 109.487,79.997 U1.108 112.942,79.997 U2.2 ; C18.2 v1(113.411,88.773)
  Top Layer w0.508: v1(90.932,65.659) 91.042,65.659 92.704,63.997 93.345,63.356 v1@93.345,62.484 ; v1@91.042,71.755 91.225,71.938 91.352,71.938 92.329,72.915 92.329,78.867 96.139,78.867 v1(97.536,80.264) 97.536,80.154 98.188,79.502 101.727,79.502 v1(102.489,80.264) 102.489,80.154 103.141,79.502 107.061,79.502 ; v1(91.186,80.391) 92.329,79.248 ; v1(93.218,62.484) v1@93.345,62.484 ; v1@93.472,62.484 v1@93.345,62.484 ; v1@103.826,62.17 v1(103.886,62.23) 103.886,63.229 ; 108.826,64.131 106.807,66.15 ; v1(109.093,80.391) 107.95,80.391 107.061,79.502 ; C18.2 114.883,88.392 U2.2 ; v1@93.345,62.484 93.98,63.119 98.154,63.119 98.933,62.34 v1(98.933,62.23) 99.932,63.229 103.886,63.229 ; 103.886,63.229 106.807,66.15 ; 106.807,66.15 108.856,68.199 v1(108.966,68.199) 108.204,68.961 108.204,73.008 108.856,73.66 v1(108.966,73.66) 107.061,75.565 107.061,79.502
  Bottom Layer w0.254: P1.33 71.247,51.435 71.247,52.506 71.26,52.519 71.26,55.499 ; P1.17 71.26,69.71 71.26,55.499 ; P1.30 71.26,55.499
  Bottom Layer w0.508: v1(90.932,65.659) 90.932,66.421 C9.2 ; v1@91.042,71.755 v1(91.059,71.755) 91.059,71.628 91.694,70.993 C8.2 ; v1(91.186,80.391) 91.186,78.994 R1.1 ; v1@93.472,62.484 C10.2 ; C21.2 96.901,79.629 v1(97.536,80.264) ; v1(98.933,62.23) 99.822,63.119 C11.2 ; C20.2 101.727,79.502 v1(102.489,80.264) ; v1(103.886,62.23) 104.648,62.992 C12.2 ; C13.2 107.823,69.342 v1(108.966,68.199) ; C15.2 107.823,80.391 v1(109.093,80.391) ; C14.2 108.204,73.66 v1(108.966,73.66)
VREF+: P1.32 U1.32 | length 21.5
  Top Layer w0.254: P1.32 84.309,64.497 U1.32
pads on no net: P1.23 P1.24 P2.35 P4.35 U2.4 X1.3

## Polygon pours and split planes (outlines as drawn)
GND on Top Layer "GND" (hatched 90Degree grid 0.508 track 0.254, pour order 2): 66.167,101.346 130.81,101.346 131.191,101.727 131.191,37.465 120.015,37.465 120.142,37.592 120.142,87.249 82.169,87.249 82.042,87.122 82.042,51.943 120.142,51.943 120.396,51.689 120.523,51.562 120.523,37.973 120.523,37.465 66.167,37.465
GND on Bottom Layer "GND" (hatched 90Degree grid 0.508 track 0.254, pour order 6): 66.167,101.727 130.937,101.727 130.937,37.973 131.191,37.719 130.937,37.465 119.888,37.465 119.888,87.122 119.761,87.249 82.296,87.249 82.296,52.324 82.169,52.197 82.296,52.324 119.888,52.324 119.888,37.592 120.015,37.465 66.167,37.465

## Keep-outs
Keep-Out Layer:
  lines w0.254: 66.167,37.465 131.191,37.465 131.191,101.727 66.167,101.727 66.167,37.465

## Silkscreen, mask and mechanical layers (free items; w line width, h text height)
Top Overlay:
  text "E2 E3" at 70.104,89.408 h0.6
  text "+5V GND" at 125.603,89.408 h0.6
  text "E4 E5" at 70.104,86.868 h0.6
  text "GND A13" at 125.73,86.868 h0.6
  text "E6 VBAT" at 69.596,84.328 h0.6
  text "A12 A11" at 125.857,84.328 h0.6
  text "C13 C14" at 69.596,81.788 h0.6
  text "A10 A9" at 125.984,81.788 h0.6
  text "C15 F0" at 69.85,79.248 h0.6
  text "A8 C9" at 126.238,79.248 h0.6
  text "F1 F2" at 70.104,76.708 h0.6
  text "C8 C7" at 126.365,76.708 h0.6
  text "F3 F4" at 70.104,74.168 h0.6
  text "C6 +5V" at 126.111,74.168 h0.6
  text "GND G8" at 125.984,71.755 h0.6
  text "F5 GND" at 69.977,71.628 h0.6
  text "VCC F6" at 69.596,69.088 h0.6
  text "G7 G6" at 126.365,69.088 h0.6
  text "F7 F8" at 70.231,66.548 h0.6
  text "G5 G4" at 126.492,66.548 h0.6
  text "F9 F10" at 69.85,64.008 h0.6
  text "G3 G2" at 126.365,64.008 h0.6
  text "NC  NC" at 69.596,61.468 h0.6
  text "D15 D14" at 125.73,61.468 h0.6
  text "RST C0" at 69.596,58.928 h0.6
  text "VDD GND" at 125.857,58.928 h0.6
  text "A12 A11" at 69.596,56.515 h0.6
  text "D13 D12" at 125.857,56.388 h0.6
  text "D11 D10" at 125.73,53.975 h0.6
  text "A12 A11" at 69.596,53.721 h0.6
  text "A12 A11" at 69.723,51.562 h0.6
  text "D9 D8" at 126.365,51.308 h0.6
  text "A12 A11" at 69.596,48.895 h0.6
  text "B15 B14" at 125.603,48.895 h0.6
  text "A12 A11" at 69.596,45.72 h0.6
  text "B13 B12" at 125.857,45.72 h0.6

## Text inside footprints (layer, text, board x,y; h text height)
P1: Top Overlay "36" at 74.422,47.371 h1.27; Top Overlay "35" at 67.056,46.863 h1.27; Top Overlay "1" at 69.723,93.599 h1.27 r270; Top Overlay "2" at 72.263,94.107 h1.27 r270
P2: Top Overlay "72" at 122.428,42.672 h1.27; Top Overlay "71" at 122.428,40.132 h1.27; Top Overlay "37" at 76.708,37.846 h1.27; Top Overlay "38" at 75.819,44.704 h1.27
P3: Top Overlay "36" at 127,92.583 h1.27 r90; Top Overlay "35" at 129.54,92.583 h1.27 r90; Top Overlay "1" at 129.54,45.339 h1.27 r90; Top Overlay "2" at 127,44.831 h1.27 r90
P4: Top Overlay "36" at 76.708,97.663 h1.27 r180; Top Overlay "35" at 76.708,100.203 h1.27 r180; Top Overlay "1" at 123.952,100.203 h1.27 r180; Top Overlay "2" at 124.46,97.663 h1.27 r180